# Altium PCB Eurocircuits4L.PcbDoc
Units mm, origin at the board's own origin, x right, y up, seen from the top; angles counter-clockwise.
Board outline 136.5 x 63.5 mm, 4 copper layers (Top Layer, Internal Plane 1, Internal Plane 2, Bottom Layer), stack 1.57 mm thick; 59 components, 57 nets, 305 pads, 5 vias.
Unrouted connection lines stored in the file: 149.
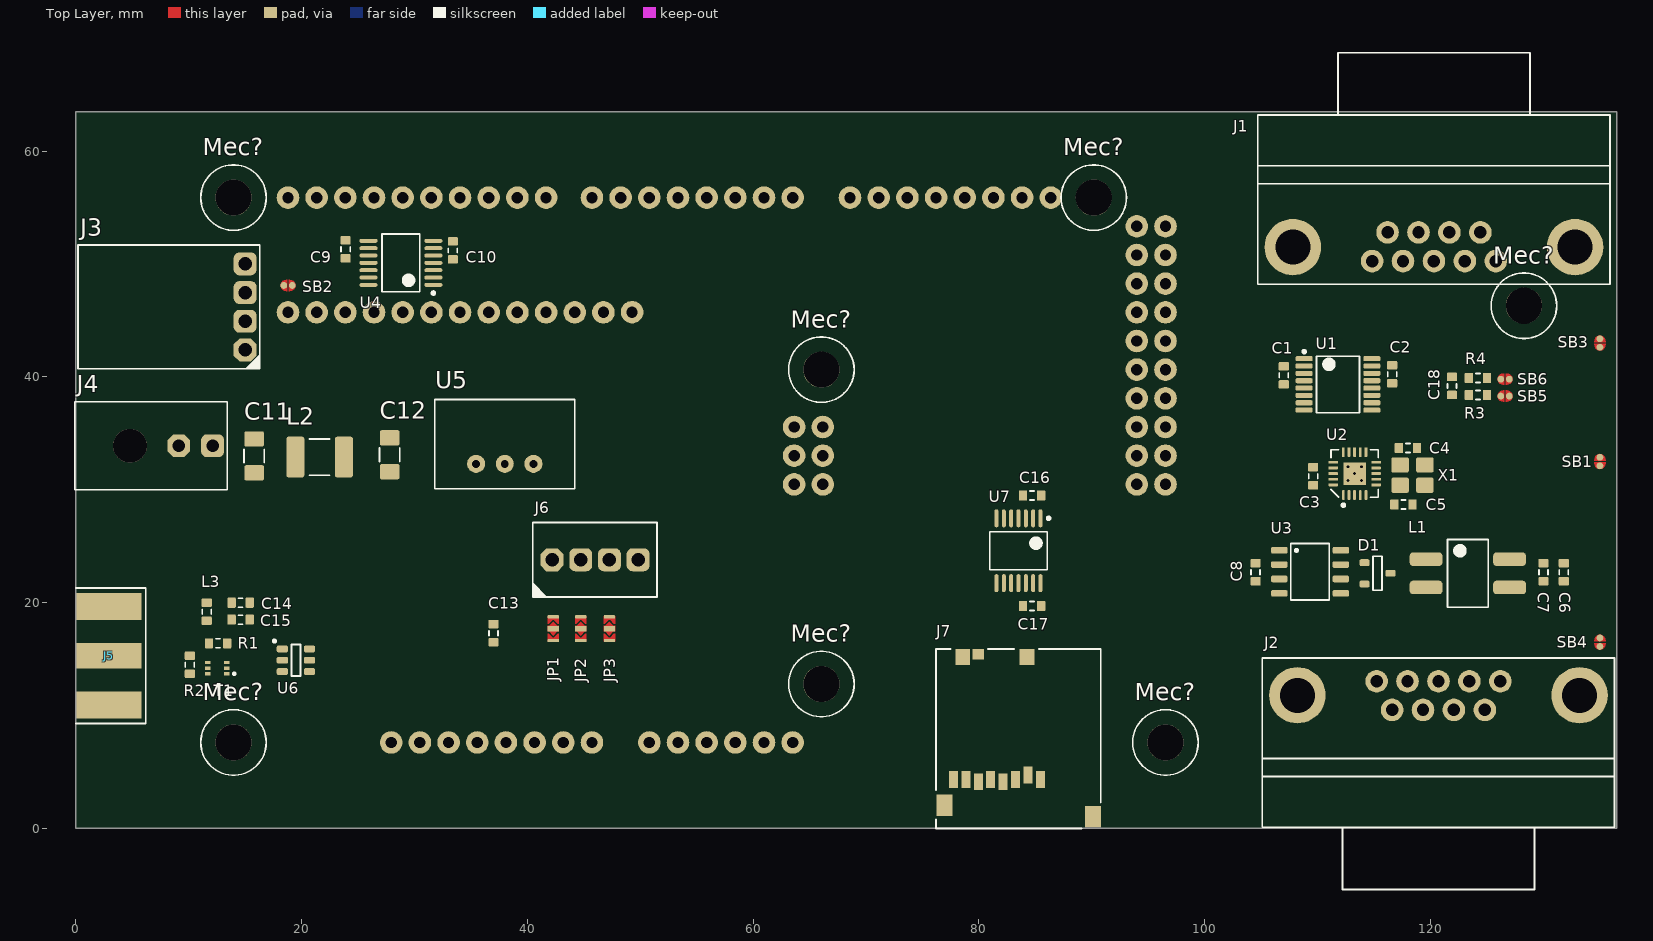
[diagram p0: Top Layer view]
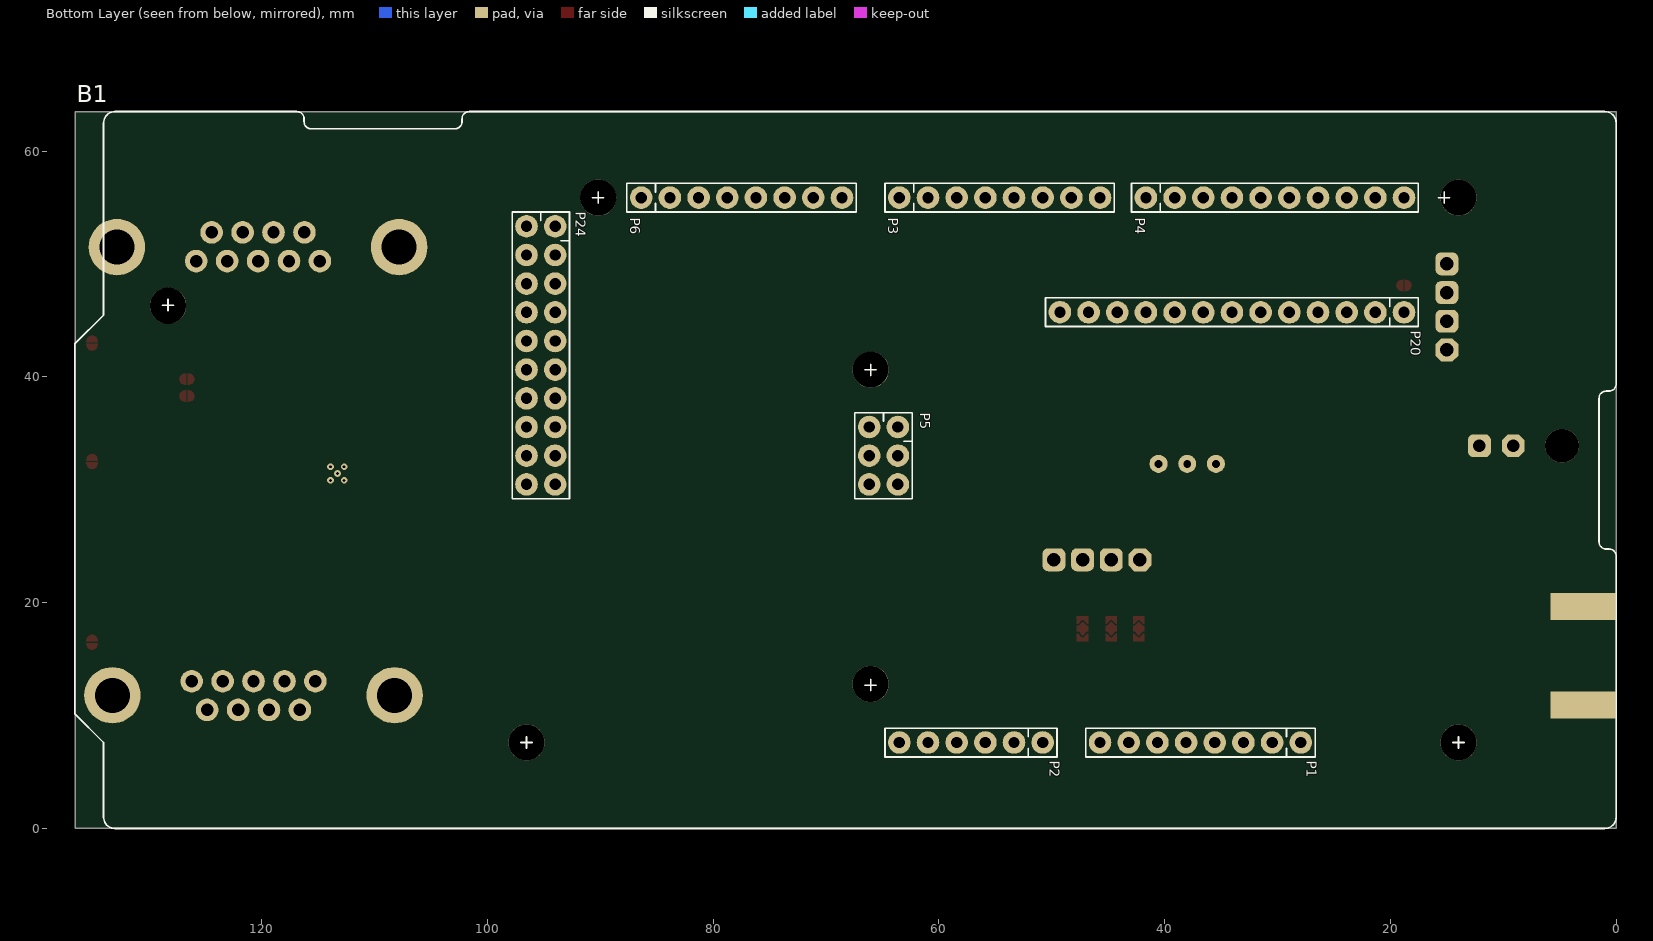
[diagram p1: Bottom Layer view, seen from below]
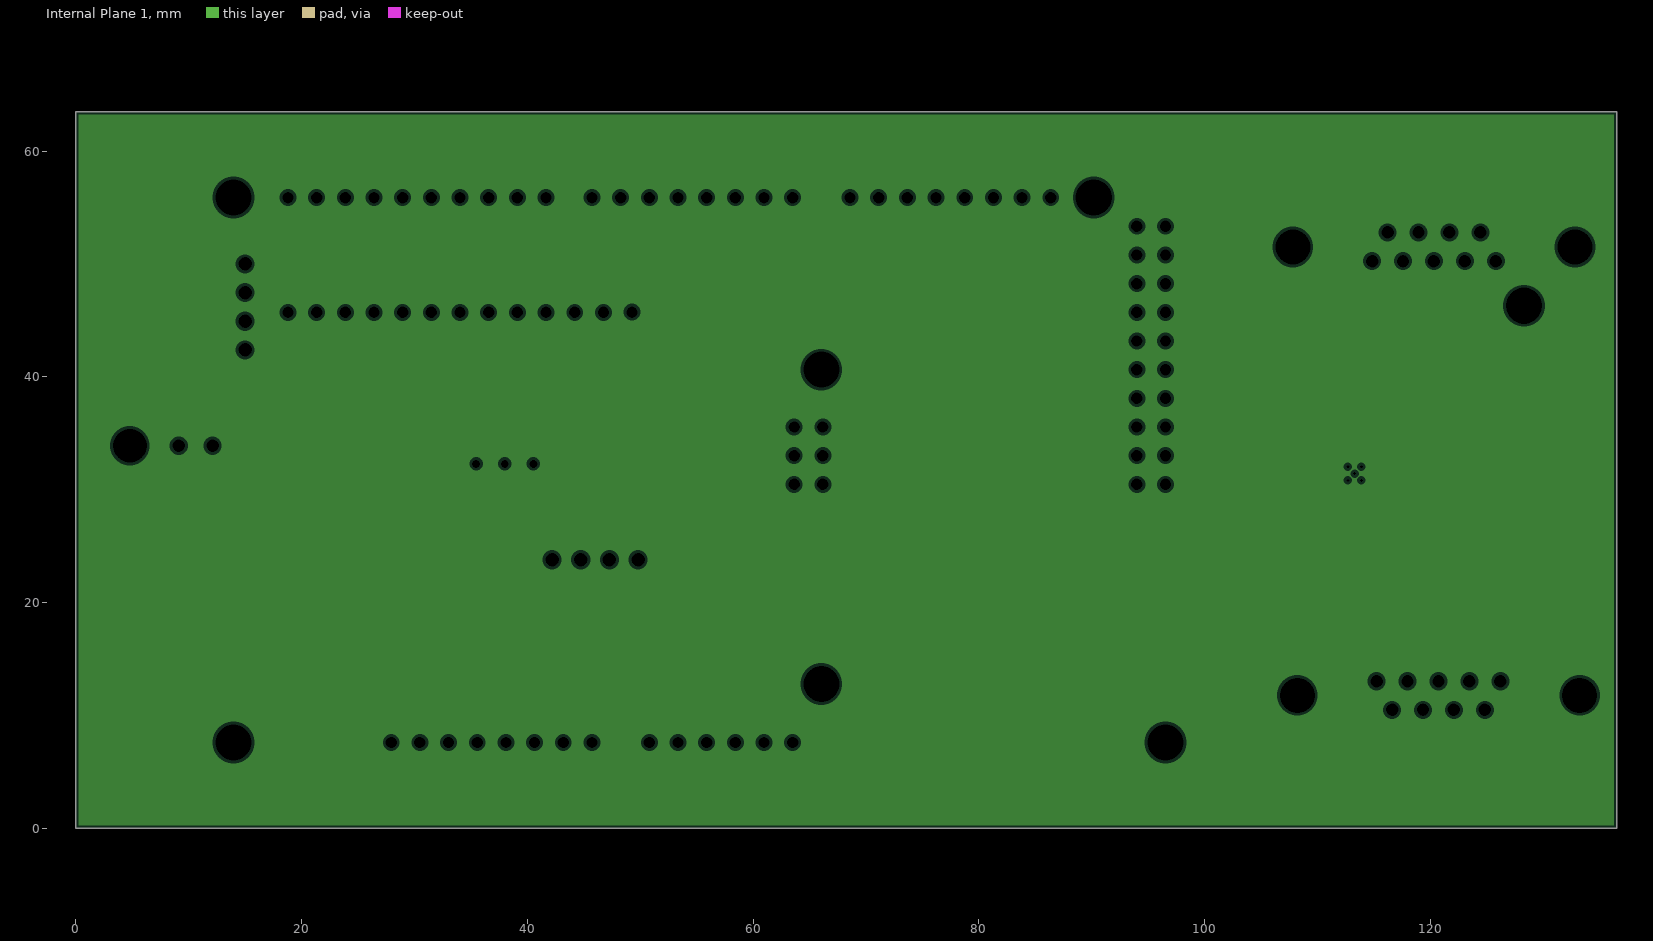
[diagram p2: Internal Plane 1, clearances drawn from the general rule]
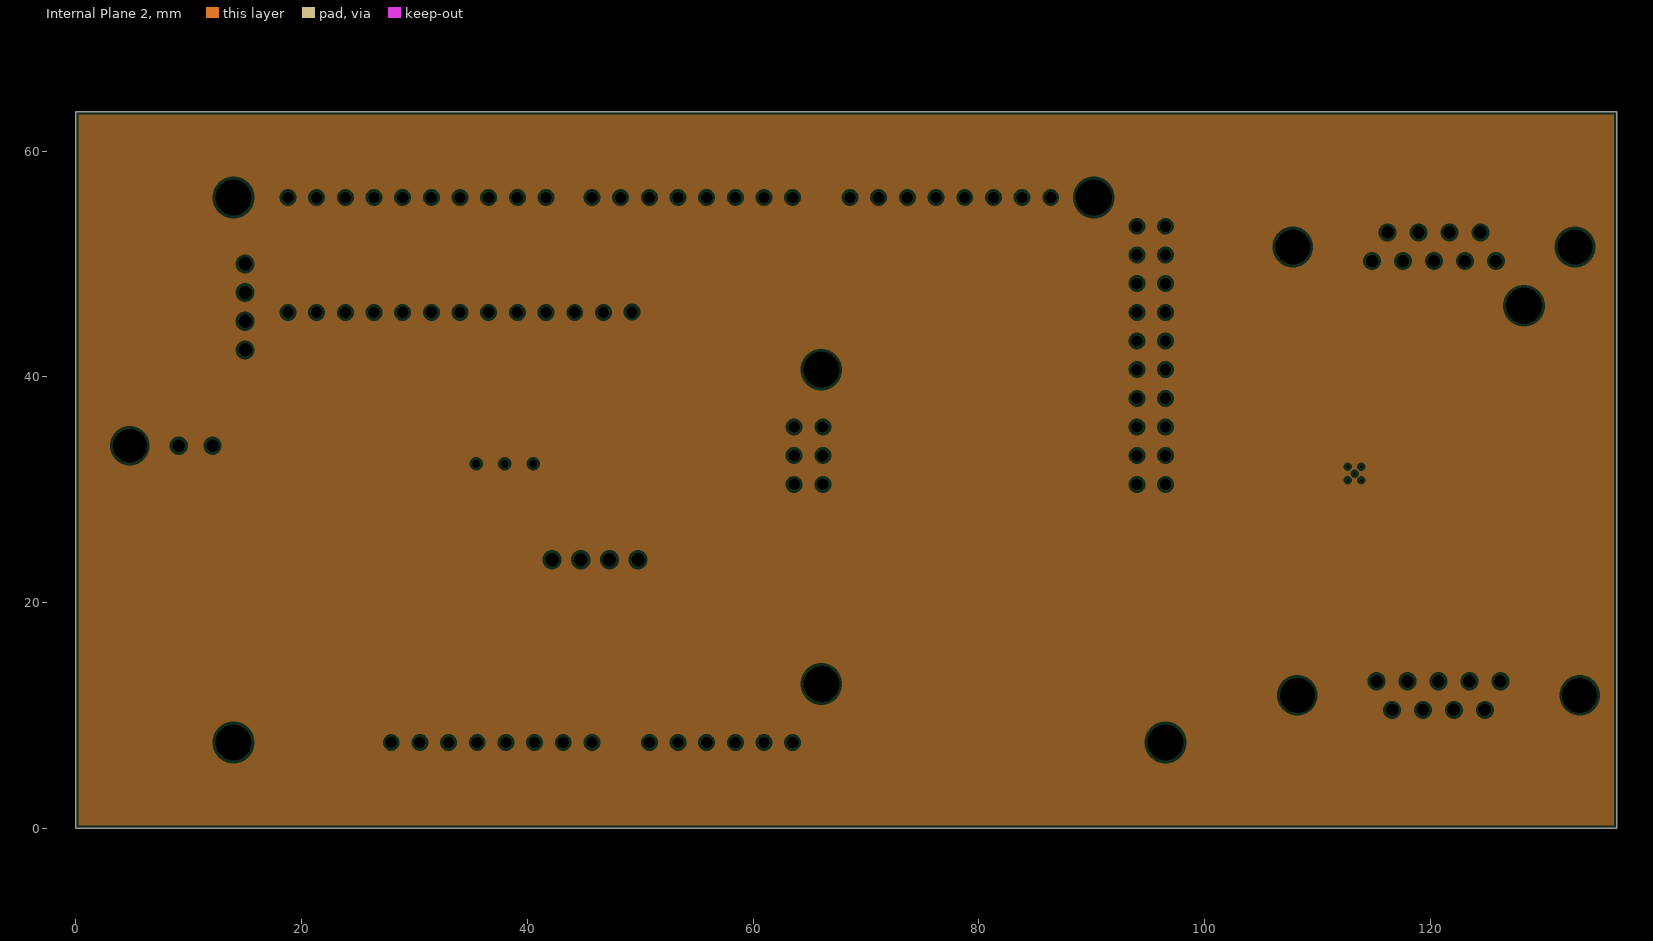
[diagram p3: Internal Plane 2, clearances drawn from the general rule]

## Layer stack, top to bottom
Top Solder: solder mask 0.01, Solder Resist, Dk 3.5
Top Layer: signal copper 0.035
Dielectric 1: prepreg 0.36, PR7826, Dk 4.32
Internal Plane 1: plane copper 0.035
Dielectric 3: core 0.71, FR-4, Dk 4.2
Internal Plane 2: plane copper 0.035
Dielectric 2: prepreg 0.36, PR7826, Dk 4.32
Bottom Layer: signal copper 0.035
Bottom Solder: solder mask 0.01, Solder Resist, Dk 3.5

## Board outline
0,0 90.709,0 136.5,0 136.5,63.5 0,63.5

## Design rules (kind name [scope] priority, off if disabled: settings)
AcuteAngle [All] p1 off: minimum=9.00000000000000E+0001 checktracksonly=TRUE
AssemblyTestPointUsage [All] p1 off:
AssemblyTestpoint [All] p1 off: testpointundercomponent=TRUE minsize=1.016 maxsize=2.54 preferedsize=1.524 minholesize=0 maxholesize=1.016 preferedholesize=0.813 testpointgrid=0.025 usegrid=TRUE gridtolerance=0 allowsidetop=TRUE allowsidebottom=TRUE
BoardOutlineClearance [All] p1 off: gap=0.25 ignorepadtopadclearanceinfootprint=FALSE
Clearance [All] p1: gap=0.15 ignorepadtopadclearanceinfootprint=FALSE except(0: Arc-Hole Track-Hole SMDPad-Hole THPad-Hole Via-Hole Fill-Hole Poly-Hole Region-Hole Text-Hole)
ComponentClearance [All] p1 off: gap=0.25 collisioncheckmode=3 verticalgap=0.25 showdistances=FALSE
DiffPairsRouting [All] p1 off: maxlimit=0.254 minlimit=0.254 mostfreqgap=0.254 toplayer_minwidth=0.381 toplayer_maxwidth=0.381 toplayer_prefwidth=0.381 bottomlayer_minwidth=0.381 bottomlayer_maxwidth=0.381 bottomlayer_prefwidth=0.381 maxuncoupledlength=12.7
FabricationTestPointUsage [All] p1 off: valid=0 allowmultiple=FALSE
FabricationTestpoint [All] p1 off: side=3 testpointundercomponent=TRUE minsize=1.016 maxsize=2.54 preferedsize=1.524 minholesize=0 maxholesize=1.016 preferedholesize=0.813 testpointgrid=0.025 allowsidetop=TRUE allowsidebottom=TRUE usegrid=TRUE gridtolerance=0
FanoutControl Fanout_BGA [IsBGA] p1 off: bgadir=Out bgaviamode=Centered fanoutstyle=Auto fanoutdirection=Alternating viagrid=0.025 // Fanout_BGA (Default Rule)
FanoutControl Fanout_LCC [IsLCC] p2 off: bgadir=Out bgaviamode=Centered fanoutstyle=Auto fanoutdirection=Alternating viagrid=0.025 // Fanout_LCC (Default Rule)
FanoutControl Fanout_SOIC [IsSOIC] p3 off: bgadir=Out bgaviamode=Centered fanoutstyle=Auto fanoutdirection=Alternating viagrid=0.025 // Fanout_SOIC (Default Rule)
FanoutControl Fanout_Small [(CompPinCount < 5)] p4 off: bgadir=Out bgaviamode=Centered fanoutstyle=Auto fanoutdirection=OutThenIn viagrid=0.025 // Fanout_Small (Default Rule)
FanoutControl Fanout_Default [All] p5 off: bgadir=Out bgaviamode=Centered fanoutstyle=Auto fanoutdirection=Alternating viagrid=0.025 // Fanout_Default (Default Rule)
Height [All] p1 off: minheight=0 maxheight=25.4 prefheight=12.7
HoleSize [All] p1: absolutevalues=TRUE maxlimit=3 minlimit=0.25 maxpercent=80.000 minpercent=20.000
HoleToHoleClearance [All] p1 off: gap=0.25 allowstackedmicrovias=TRUE
LayerPairs [All] p1 off: enforce=TRUE
MinimumAnnularRing [All] p1 off: minimumring=0.175
MinimumSolderMaskSliver [All] p1 off: minsoldermaskwidth=0
NetAntennae [All] p1 off: netantennaetolerance=0
PasteMaskExpansion [All] p1 off: expansion=0
PlaneClearance [All] p1: clearance=0.25
PlaneConnect [All] p1: planeconnectstyle=Direct reliefexpansion=0.5 reliefentries=4 reliefconductorwidth=0.25 reliefairgap=0.25
PolygonConnect [All] p1: connectstyle=Direct reliefconductorwidth=0.25 reliefentries=4 polygonreliefangle="90 Angle" airgapwidth=0.25
RoutingCorners [All] p1 off: cornerstyle=45-Degree minsetback=2.5 maxsetback=2.5
RoutingLayers [All] p1 off: top layer_v5=TRUE bottom layer_v5=TRUE
RoutingPriority [All] p1 off: routingpriority=0
RoutingTopology [All] p1 off: topology=Shortest
RoutingVias [All] p1: holewidth=0.25 width=0.6 viastyle="Through Hole" minholewidth=0.15 minwidth=0.5 maxholewidth=0.9 maxwidth=1.5 useviatemplates=TRUE viatemplateguid#1={857F750E-5D3C-416E-893E-D7E0D3E4223C} viatemplatename#1=v60h25m0mx0
SilkToBoardRegionClearance [All] p1 off:
SilkToSilkClearance [All] p1 off: silktosilkclearance=0
SilkToSolderMaskClearance [IsPad] p1 off: minsilkscreentomaskgap=0 clearancetoexposedcopper=TRUE
SolderMaskExpansion [All] p1: expansion=0 istentingtop=FALSE
Width [All] p1: maxlimit=4 minlimit=0.15 preferedwidth=0.25
3 further rules are at their usual default settings.

## Classes and differential pairs
component class nRF7002-DK: B1 C9 C10 C11 C12 J3 J4 L2 Mec? SB2 U4 U5
component class GPS-SD: C13 C14 C15 C16 C17 J5 J6 J7 JP1 JP2 JP3 L3 R1 R2 T1 U6 U7
component class CanController: C1 C2 C3 C4 C5 C6 C7 C8 C18 D1 J1 J2 L1 R3 R4 SB1 SB3 SB4 SB5 SB6 U1 U2 U3 X1

## Components (designator, comment, footprint, x,y, rotation, side; value= is the part's Value field where it differs from the comment)
B1 "NRF52DK socket" "nRF5340DK SOCKET" 0,63.5 r0 bottom locked
C1 "100n" "CAPACITOR 1608 REFLOW" 107,40.136 r90 top
C2 "100n" "CAPACITOR 1608 REFLOW" 116.6,40.236 r90 top
C3 "100n" "CAPACITOR 1608 REFLOW" 109.6,31.2 r90 top
C4 "22pF" "CAPACITOR 1608 REFLOW" 118,33.7 r0 top
C5 "22pF" "CAPACITOR 1608 REFLOW" 117.6,28.7 r180 top
C6 "100pF" "CAPACITOR 1608 REFLOW" 131.8,22.7 r270 top
C7 "100pF" "CAPACITOR 1608 REFLOW" 130,22.7 r90 top
C8 "100n" "CAPACITOR 1608 REFLOW" 104.5,22.7 r270 top
C9 "100n" "CAPACITOR 1608 REFLOW" 23.9,51.3 r270 top
C10 "100n" "CAPACITOR 1608 REFLOW" 33.4,51.2 r270 top
C11 "10uF" "CAPACITOR 3216 REFLOW" 15.8,33 r270 top
C12 "10uF" "CAPACITOR 3216 REFLOW" 27.8,33.1 r270 top
C13 "100n" "CAPACITOR 1608 REFLOW" 37,17.3 r270 top
C14 "47pF" "CAPACITOR 1608 REFLOW" 14.6,20 r0 top
C15 "10nF" "CAPACITOR 1608 REFLOW" 14.6,18.5 r180 top
C16 "100n" "CAPACITOR 1608 REFLOW" 84.7,29.5 r0 top
C17 "100n" "CAPACITOR 1608 REFLOW" 84.7,19.7 r0 top
C18 "4.7nF" "CAPACITOR 1608 REFLOW" 121.9,39.2 r270 top
D1 "ESDCAN__-2BLY" "SOT23 P0.95 C1.6x3.0 H1.3" 115.3,22.6 r0 top
J1 "D-SUB 9 MALE GROUNDED" "D-SUB 9 MALE ANGLE" 120.3,55.7 r90 top
J2 "D-SUB 9 MALE GROUNDED" "D-SUB 9 MALE ANGLE" 120.7,7.6 r270 top
J3 "MOLEX 22057048" "MOLEX 22057048" 15,46.2 r270 top
J4 "MOLEX 43045-0200" "MOLEX 43045-0200" 10.62,33.9 r270 top
J5 "732511150" "SMA EDGE Molex 732511150" 0,15.3 r0 top
J6 "MOLEX 22272041" "MOLEX 22272041" 46,23.8 r180 top
J7 "GTC MEM20_1-00-195-00-A" "SD MICRO GCT MEM2051-00-195-00-A" 83.5,8 r0 top
JP1 "{Value}" "JUMPER3 SMD 1608" 42.3,17.7 r90 top
JP2 "{Value}" "JUMPER3 SMD 1608" 44.73,17.7 r90 top
JP3 "{Value}" "JUMPER3 SMD 1608" 47.27,17.7 r90 top
L1 "*" "L CM 2X B82793C EPCOS" 123.3,22.6 r0 top
L2 "*" "INDUCTOR 4532 REFLOW" 21.6,32.9 r0 top
L3 "27nH" "INDUCTOR 1608 REFLOW" 11.6,19.2 r90 top
Mec? "" "Screw Hex Socket M3X5 Unconnected" 90.17,55.88 r0 top locked
Mec? "" "Screw Hex Socket M3X5 Unconnected" 128.27,46.3 r0 top locked
Mec? "" "Screw Hex Socket M3X5 Unconnected" 13.97,7.62 r0 top locked
Mec? "" "Screw Hex Socket M3X5 Unconnected" 66.04,40.64 r0 top locked
Mec? "" "Screw Hex Socket M3X5 Unconnected" 13.97,55.88 r0 top locked
Mec? "" "Screw Hex Socket M3X5 Unconnected" 66.04,12.8 r0 top locked
Mec? "" "Screw Hex Socket M3X5 Unconnected" 96.52,7.62 r0 top locked
R1 "10" "RESISTOR 1608 REFLOW" 12.6,16.4 r180 top
R2 "100k" "RESISTOR 1608 REFLOW" 10.1,14.5 r270 top
R3 "60" "RESISTOR 1608 REFLOW" 124.2,38.4 r0 top
R4 "60" "RESISTOR 1608 REFLOW" 124.2,39.9 r0 top
SB1 "*" "Solder Bridge 1mm Unconnected" 135,32.5 r90 top net-tie
SB2 "*" "Solder Bridge 1mm Unconnected" 18.8,48.1 r0 top net-tie
SB3 "*" "Solder Bridge 1mm Unconnected" 135,43 r90 top net-tie
SB4 "*" "Solder Bridge 1mm Unconnected" 135,16.5 r270 top net-tie
SB5 "*" "Solder Bridge 1mm Unconnected" 126.6,38.3 r0 top net-tie
SB6 "*" "Solder Bridge 1mm Unconnected" 126.6,39.8 r0 top net-tie
T1 "Si1016X" "SOT563F P0.5 C1.6x1.2 H0.6" 12.534,14.2 r180 top
U1 "TXB0106PWR" "TSSOP16 P0.65 C5.0x4.5 H1.1" 111.8,39.336 r0 top
U2 "MCP2515I/ML" "QFN20 P0.5 T2.05x2.05 C4.0x4.0 H0.85" 113.273,31.436 r90 top
U3 "SN65HVD232D" "SO8 P1.27 C4.0X5.0 H1.75" 109.325,22.735 r0 top
U4 "TXB0104PWR" "TSSOP14 P0.65 C4.4x5.0 H1.1" 28.8,50.1 r180 top
U5 "*" "TRACO TSR 1" 38,32.3 r0 top
U6 "SN74LVC2G17" "SOT23-6 P0.95 C1.5x3.0 H1.3" 19.5,14.9 r0 top
U7 "TXB0104PWR" "TSSOP14 P0.65 C4.4x5.0 H1.1" 83.5,24.6 r270 top
X1 "*" "CRYSTAL C3.2x2.5 Kyocera CX3225SB" 118.4,31.3 r0 top

## Footprints (in the part's own frame and the unit in brackets; to place one, negate y for a bottom-side part, rotate by r counter-clockwise, add the part's x,y. Pads: shape width x height; smd on the part's side, far side on the other; paste and mask are expansions set on the pad)
"CAPACITOR 1608 REFLOW" [mm] "Capacitor SMD 1.6x0.8mm (0603-imperial)"
  rrect25% 0.75x0.9 smd: 1(-0.8,0) 2(0.8,0)
  silkscreen extent -0.2,-0.4 0.2,0.4, body extent -0.8,-0.4 0.8,0.4, height 0.8
"CAPACITOR 3216 REFLOW" [mm] "Capacitor SMD 3.2x1.6mm (1206-imperial)"
  rrect25% 1.35x1.75 smd: 1(-1.5,0) 2(1.5,0)
  silkscreen extent -0.6,-0.9 0.6,0.9, body extent -1.7,-0.9 1.7,0.9, height 1.6
"CRYSTAL C3.2x2.5 Kyocera CX3225SB" [mm] "CRYSTAL C3.2x2.5 Kyocera CX3225SB"
  rrect25% 1.55x1.35 smd: 1(-1.1,-0.9) 2(1.1,-0.9) 3(1.1,0.9) 4(-1.1,0.9)
  body extent -1.6,-1.3 1.6,1.3, height 0.6
"D-SUB 9 MALE ANGLE" [mm] "D-SUB9M HARTING"
  round 2 hole 1.1: 1(-5.44,-5.48) 2(-5.44,-2.74) 3(-5.44,0) 4(-5.44,2.74) 5(-5.44,5.48) 6(-2.9,-4.11) 7(-2.9,-1.37) 8(-2.9,1.37) 9(-2.9,4.11)
  round 5 hole 3.1: 10(-4.2,12.5) 11(-4.2,-12.5)
  silkscreen extent -7.5,-15.6 13,15.6, body extent -7.4,-15.6 13.8,15.6, height 13.65
"INDUCTOR 1608 REFLOW" [mm] "Inductor SMD 1.6x0.8mm (0603-imperial)"
  rrect25% 0.75x0.9 smd: 1(-0.8,0) 2(0.8,0)
  silkscreen extent -0.2,-0.4 0.2,0.4, body extent -0.8,-0.4 0.8,0.4, height 0.45
"INDUCTOR 4532 REFLOW" [mm] "Inductor SMD 4.5x3.2mm (1812-imperial)"
  rrect25% 1.6x3.6 smd: 1(-2.15,0) 2(2.15,0)
  silkscreen extent -0.9,-1.6 0.9,1.6, body extent -2.3,-1.6 2.3,1.6, height 1.2
"JUMPER3 SMD 1608" [mm] "JUMPER SMD 3LEADS 1608 (0603-Imperial)"
  rrect50% 0.3x1 smd paste-0.8 mask-0.5: 1(-1.05,0) 3(1.05,0)
  rect 0.5x1 smd paste-0.8 mask-0.5: 2(0,0)
  Top Layer region: -1.1,0.5 -1.1,-0.5 -0.45,-0.5 -0.45,-0.4 -0.8,-0.05 -0.8,0.05 -0.45,0.4 -0.45,0.5
  Top Layer region: -0.25,0.35 -0.625,0 -0.25,-0.35 -0.25,-0.5 0.25,-0.5 0.25,-0.35 0.6,0 0.25,0.35 0.25,0.5 0.1,0.5 -0.25,0.5
  Top Layer region: 1.1,-0.5 1.1,0.5 0.45,0.5 0.45,0.4 0.8,0.05 0.8,-0.05 0.45,-0.4 0.45,-0.5
"L CM 2X B82793C EPCOS" [mm]
  rrect50% 2.9x1.2 smd: 1(-3.7,1.25) 2(-3.7,-1.25) 3(3.7,-1.25) 4(3.7,1.25)
  silkscreen extent -1.8,-3 1.8,3, body extent -3.55,-3 3.55,3, height 4.9
"MOLEX 43045-0200" [mm] "Micro-Fit 3.0 Right Angle Header, 3.00mm Pitch, Dual Row, 2 Circuits"
  round 3 hole 3 unplated paste-25.4 mask-25.4: 0(0,-5.82)
  oct 2.032x2.032 hole 1.1: 1(0,-1.5)
  rrect50% 2.032x2.032 hole 1.1: 2(0,1.5)
  silkscreen extent -3.9,-10.7 3.9,2.8, body extent -3.57,-10.45 3.58,1.79, height 8.78
"MOLEX 22057048" [mil] "KK 254 Wire-to-Board Header, Right-Angle, 4 Circuits"
  oct 80x80 hole 47.24: 1(150,0)
  rrect50% 80x80 hole 47.24: 2(50,0) 3(-50,0) 4(-150,0)
  silkscreen extent -216,-583 216,51, body extent -200,-567 200,13, height 231
"MOLEX 22272041" [mil] "KK 254 Wire-to-Board Header, Vertical, 4 Circuits"
  oct 80x80 hole 47.24: 1(150,0)
  rrect50% 80x80 hole 47.24: 2(50,0) 3(-50,0) 4(-150,0)
  silkscreen extent -216,-130 218,130, body extent -200,-114 200,114, height 461
"nRF5340DK SOCKET" [mm] "nRF5340DK Dongle socket"
  round 2 hole 1: P1.1(27.941,55.88) P1.2(30.48,55.88) P1.3(33.021,55.88) P1.4(35.56,55.88) P1.5(38.101,55.88) P1.6(40.641,55.88) P1.7(43.181,55.88) P1.8(45.721,55.88) P2.1(50.801,55.88) P2.2(53.34,55.88) P2.3(55.881,55.88) P2.4(58.42,55.88) P2.5(60.961,55.88) P2.6(63.501,55.88) P3.1(63.501,7.62) P3.2(60.961,7.62) P3.3(58.421,7.62) P3.4(55.881,7.62) P3.5(53.341,7.62) P3.6(50.8,7.62) P3.7(48.26,7.62) P3.8(45.72,7.62) P4.1(41.657,7.62) P4.2(39.117,7.62) P4.3(36.577,7.62) P4.4(34.037,7.62) P4.5(31.497,7.62) P4.6(28.957,7.62) P4.7(26.417,7.62) P4.8(23.877,7.62) P4.9(21.336,7.62) P4.10(18.796,7.62) P5.1(63.627,27.94) P5.2(66.167,27.94) P5.3(63.627,30.48) P5.4(66.167,30.48) P5.5(63.627,33.02) P5.6(66.167,33.02) P6.1(86.361,7.62) P6.2(83.821,7.62) P6.3(81.281,7.62) P6.4(78.741,7.62) P6.5(76.201,7.62) P6.6(73.661,7.62) P6.7(71.121,7.62) P6.8(68.581,7.62) P20.1(18.797,17.78) P20.2(21.337,17.78) P20.3(23.877,17.78) P20.4(26.417,17.78) P20.5(28.957,17.78) P20.6(31.497,17.78) P20.7(34.037,17.78) P20.8(36.577,17.78) P20.9(39.117,17.78) P20.10(41.657,17.78) P20.11(44.197,17.78) P20.12(46.737,17.78) P20.13(49.277,17.768) P24.1(93.98,10.16) P24.2(96.52,10.16) P24.3(93.98,12.7) P24.4(96.52,12.7) P24.5(93.98,15.24) P24.6(96.52,15.24) P24.7(93.98,17.78) P24.8(96.52,17.78) P24.9(93.98,20.32) P24.10(96.52,20.32) P24.11(93.98,22.86) P24.12(96.52,22.86) P24.13(93.98,25.4) P24.14(96.52,25.4) P24.15(93.98,27.94) P24.16(96.52,27.94) P24.17(93.98,30.48) P24.18(96.52,30.48) P24.19(93.98,33.02) P24.20(96.52,33.02)
  silkscreen extent 0,0 136.53,63.5, body extent 17.53,6.35 97.79,57.15, height 8.5
"QFN20 P0.5 T2.05x2.05 C4.0x4.0 H0.85" [mm] "QFN20 P0.5 T2.05x2.0 C4.0x4.0 H0.85"
  rrect50% 0.85x0.25 smd: 1(-1.9,1) 2(-1.9,0.5) 3(-1.9,0) 4(-1.9,-0.5) 5(-1.9,-1) 11(1.9,-1) 12(1.9,-0.5) 13(1.9,0) 14(1.9,0.5) 15(1.9,1)
  rrect50% 0.25x0.85 smd: 6(-1,-1.9) 7(-0.5,-1.9) 8(0,-1.9) 9(0.5,-1.9) 10(1,-1.9) 16(1,1.9) 17(0.5,1.9) 18(0,1.9) 19(-0.5,1.9) 20(-1,1.9)
  rect 2x2 smd: 21(0,0)
  silkscreen extent -2.92,-2.1 2.1,2.1, body extent -2,-2 2,2, height 0.86
"RESISTOR 1608 REFLOW" [mm] "Resistor SMD 1.6x0.8mm (0603-imperial)"
  rrect25% 0.75x0.9 smd: 1(-0.8,0) 2(0.8,0)
  silkscreen extent -0.2,-0.4 0.2,0.4, body extent -0.77,-0.42 0.78,0.43, height 0.45
"Screw Hex Socket M3X5 Unconnected" [mm] "Screw Hex Socket M3X5 Unconnected BN610"
  round 3.2 hole 3.2 unplated paste+0 mask+0: 0(0,0)
  silkscreen extent -2.9,-2.9 2.9,2.9, body extent -2.75,-2.75 2.75,2.75, height 3.01
"SD MICRO GCT MEM2051-00-195-00-A" [mm] "SD MICRO GCT MEM2051-00-195-00-A"
  rect 1.4x1.9 smd: 0(-6.55,-5.95) 0(6.6,-6.95)
  rect 1.3x1.4 smd: 0(-4.95,7.2) 0(0.75,7.2)
  rect 0.8x1.5 smd: 1(1.94,-3.66) 2(0.84,-3.26) 3(-0.26,-3.66) 4(-1.36,-3.86) 5(-2.46,-3.66) 6(-3.56,-3.86) 7(-4.66,-3.66) 8(-5.76,-3.66)
  rect 1x0.95 smd: 9(-3.56,7.425)
  silkscreen extent -7.3,-8 7.3,7.9, body extent -7.05,-11.27 7.05,7.57, height 2
"SMA EDGE Molex 732511150" [mm] "Connector SMA, Board edge mount, SMA EDGE Molex 732511150"
  rect 5.8x2.3 smd: 1(2.9,0)
  rect 5.8x2.4 smd: 2(2.9,-4.35) 2(2.9,4.38)
  rect 5.8x2.4 smd far side: 2(2.9,-4.35) 2(2.9,4.38)
  silkscreen extent 0,-6 6.2,6, body extent -9.6,-4.76 4.67,4.76, height 4.36
"SO8 P1.27 C4.0X5.0 H1.75" [mm] "8-Pin Small Outline Integrated Circuit 1.27 mm Pitch, IPC Medium Density"
  rrect50% 1.45x0.6 smd: 1(-2.725,1.905) 2(-2.725,0.635) 3(-2.725,-0.635) 4(-2.725,-1.905) 5(2.725,-1.905) 6(2.725,-0.635) 7(2.725,0.635) 8(2.725,1.905)
  silkscreen extent -1.7,-2.5 1.7,2.5, body extent -3,-2.45 3,2.45, height 1.75
"Solder Bridge 1mm Unconnected" [mm] "Solder Bridge Unconnected by default, Solderable"
  round 0.6 smd paste-0.8 mask+0: 1(-0.375,0) 2(0.375,0)
  Top Layer region: 0.075,-0.5 0.175,-0.5 0.675,0 0.175,0.5 0.075,0.5
  Top Layer region: -0.075,0.5 -0.175,0.5 -0.675,0 -0.175,-0.5 -0.075,-0.5
  Top Layer lines w0.2: -0.175,0.4 ccw(c-0.175,0) -0.175,-0.4 ; 0.175,0.4 cw(c0.175,0) 0.175,-0.4
"SOT23 P0.95 C1.6x3.0 H1.3" [mm] "SOT23, 3-Leads, Body 1.6x3.0mm, Pitch 0.95mm, IPC Medium Density"
  rrect50% 0.9x0.6 smd: 1(-1.15,0.95) 2(-1.15,-0.95) 3(1.15,0)
  silkscreen extent -0.4,-1.5 0.4,1.5, body extent -1.4,-1.45 1.4,1.45, height 1.3
"SOT23-6 P0.95 C1.5x3.0 H1.3" [mm] "SOT23, 6-Leads, Body 1.6x3.0mm, Pitch 0.95mm, IPC Medium Density"
  rrect50% 1x0.6 smd: 1(-1.2,1) 2(-1.2,0) 3(-1.2,-1) 4(1.2,-1) 5(1.2,0) 6(1.2,1)
  silkscreen extent -2,-1.4 0.4,1.8, body extent -1.4,-1.45 1.4,1.45, height 1.45
"SOT563F P0.5 C1.6x1.2 H0.6" [mm] "SOT563, 6-Leads, Body 1.6x1.2mm, Pitch 0.5mm, Height 0.60mm"
  rect 0.492x0.3 smd: 1(-0.834,0.5) 2(-0.834,0) 3(-0.834,-0.5) 4(0.834,-0.5) 5(0.834,0) 6(0.834,0.5)
  silkscreen extent -1.6,0.39 -1.4,0.59, body extent -0.81,-0.8 0.81,0.8, height 0.6
"TRACO TSR 1" [mm] "DC/DC Converter"
  round 1.6 hole 0.7: 1(-2.54,0) 2(0,0) 3(2.54,0)
  silkscreen extent -6.2,-2.2 6.2,5.7, body extent -6,-2 6,5.5, height 10.5
"TSSOP14 P0.65 C4.4x5.0 H1.1" [mm] "TSSOP, 14-Leads, Body 5x4.4mm, Pitch 0.65mm, IPC Medium Density"
  oval 1.6x0.35 smd: 1(-2.875,1.95) 2(-2.875,1.3) 3(-2.875,0.65) 4(-2.875,0) 5(-2.875,-0.65) 6(-2.875,-1.3) 7(-2.875,-1.95) 8(2.875,-1.95) 9(2.875,-1.3) 10(2.875,-0.65) 11(2.875,0) 12(2.875,0.65) 13(2.875,1.3) 14(2.875,1.95)
  silkscreen extent -3,-2.55 1.68,2.8, body extent -2.25,-2.55 2.25,2.55, height 1.11
"TSSOP16 P0.65 C5.0x4.5 H1.1" [mm] "TSSOP-16 NXP"
  rrect50% 1.5x0.45 smd: 1(-3,2.275) 2(-3,1.625) 3(-3,0.975) 4(-3,0.325) 5(-3,-0.325) 6(-3,-0.975) 7(-3,-1.625) 8(-3,-2.275) 9(3,-2.275) 10(3,-1.625) 11(3,-0.975) 12(3,-0.325) 13(3,0.325) 14(3,0.975) 15(3,1.625) 16(3,2.275)
  silkscreen extent -3.12,-2.5 1.9,3.02, body extent -2.25,-2.5 2.25,2.5, height 1.1

## Part data
B1: library part "nRF5340DK Socket", "nRF53 development kit"
C1 C2 C3 C4 C5 C6 C7 C8 C9 C10 C11 C12 C13 C14 C15 C16 C17 C18: library part Capacitor, "Capacitor"
D1: library part "Diode ESDCAN__-2BLY", "Automotive dual-line TVS diode"
J1 J2: "D-Subminiature 9 way Plug Right Angle"
J3: "KK 254 Wire-to-Board Header, Right-Angle, 4 Circuits"
J4: "Micro-Fit 3.0 Right-Angle Header, 3.00mm, Dual Row, 2 Circuits"
J5: library part "SMA EDGE Molex 732511150", "SMA EDGE Molex 732511150"
J6: "KK 254 Wire-to-Board Header, Vertical, 4 Circuits"
J7: library part "SD-MICRO GTC MEM20_1-00-195-00-A", "SD Card Micro", Package=None, Availability=Warning, Check_prices=https://www.snapeda.com/parts/MEM2051-00-195-00-A/Global%20Connector%20Technology/view-part/779220/?ref=eda, MF="Global Connector Technology", MP=MEM2051-00-195-00-A, Price=None, Purchase-URL=https://pricing.snapeda.com/search/part/MEM2051-00-195-00-A/?ref=eda, SnapEDA_Link=https://www.snapeda.com/parts/MEM2051-00-195-00-A/Global%20Connector%20Technology/view-part/779220/?ref=snap
JP1 JP2 JP3: library part "JUMPER 3 POS", "JUMPER 3 POS"
L1: library part "L CM 2X B82793C0 EPCOS", "Inductor Common Mode Filter"
L2 L3: library part Inductor, "Inductor"
Mec? Mec? Mec? Mec? Mec? Mec? Mec?: library part "Screw Hex Socket Unconnected", "Screw Hex Socket Unconnected BN610"
R1 R2 R3 R4: library part Resistor, "Resistor"
SB1 SB2 SB3 SB4 SB5 SB6: library part "Solderbridge Unconnected", "Solderbridge Unconnected"
T1: "Complementary N- and P-Channel 20 V (D-S) MOSFET"
U1: "6-Bit Bidirectional Level-Shifting and Voltage Translator / With Auto-Direction Sensing and ±15-kV ESD Protection"
U2: "Stand-Alone CAN Controller with SPI Interface"
U3: "CAN Bus Transceiver 3V3"
U4 U7: "4-Bit Bidirectional Voltage-Level Translator With utomatic Direction Sensing and ±15-kV ESD Protection"
U5: library part "TRACO TSR 1", "DC/DC Converter"
U6: "Dual Schmitt-Trigger Buffer"
X1: library part "Crystal C3.2x2.5 Kyocera CX3225SB", "Crystal C3.2x2.5 Kyocera CX3225SB"

## Via types
v1: diameter 0.6, hole 0.25, Top Layer to Bottom Layer, 5 vias

## Nets (pads, with @x,y where several pads share a name; then routed paths per layer and width w, separated by ;. In a path a pad name is that pad's centre, name@x,y a point inside that pad or via, vN(x,y) a via of type N, cw(c..) or ccw(c..) an arc to the next point about the centre after c; other vN are vias at no path point)
+1.8: B1.P1.1 B1.P1.2 B1.P1.4 C1.2 C9.1 C16.2 U1.2 U1.8 U4.1 U4.8 U7.1 U7.8
+3.3: B1.P20.9 C2.2 C3.2 C8.2 C10.2 C17.2 J7.4 JP1.1 SB2.2 U1.15 U2.17 U2.18 U3.3 U4.14 U5.3 U7.14
+3.3-GPS: C13.2 JP1.2
+5: B1.P1.5
GND: B1.P1.6 B1.P1.7 B1.P4.7 B1.P24.19 B1.P24.20 C1.1 C2.1 C3.1 C4.1 C5.1 C6.1 C7.1 C8.1 C9.2 C10.1 C11.2 C12.2 C13.1 C15.1 C16.1 C17.1 C18.1 D1.3 J1.3 J1.9 J2.3 J2.9 J3.4 J4.1 J5.2 J6.4 J7.6 SB3.1 SB4.1 T1.1 U1.9 U2.8 U2.21 U3.2 U4.7 U5.2 U6.2 U6.3 U7.7 X1.2 X1.4
  other v1: 112.673,30.836 113.873,30.836 113.273,31.436 112.673,32.036 113.873,32.036
NetB1_P2.2: B1.P2.2 U7.5
NetB1_P2.3: B1.P2.3 U7.4
NetB1_P2.4: B1.P2.4 U7.3
NetB1_P2.5: B1.P2.5 U7.2
NetB1_P2.6: B1.P2.6 J7.9
NetB1_P4.1: B1.P4.1 U1.7
NetB1_P4.2: B1.P4.2 U1.5
NetB1_P4.3: B1.P4.3 U1.4
NetB1_P4.4: B1.P4.4 U1.3
NetB1_P4.5: B1.P4.5 U1.1
NetB1_P4.6: B1.P4.6 U4.5
NetB1_P4.8: B1.P4.8 U4.4
NetB1_P4.9: B1.P4.9 U4.3
NetB1_P4.10: B1.P4.10 U4.2
NetC4_2: C4.2 U2.7 X1.3
NetC5_2: C5.2 U2.6 X1.1
NetC6_2: C6.2 J1.8 J2.8 L1.3 SB5.2
NetC7_2: C7.2 J1.4 J2.4 L1.4 SB6.2
NetC12_1: C12.1 L2.2 U5.1
NetC14_1: C14.1 J5.1 L3.2
NetC15_2: C15.2 L3.1 R1.2 U6.1
NetC18_2: C18.2 R3.1 R4.1
NetD1_1: D1.1 L1.1 U3.7
NetD1_2: D1.2 L1.2 U3.6
NetJ1_6: J1.6 J2.6 SB1.2
NetJ1_10: J1.10 J1.11 SB3.2
NetJ2_10: J2.10 J2.11 SB4.2
NetJ3_1: J3.1 SB2.1
NetJ3_2: J3.2 U4.11
NetJ3_3: J3.3 U4.10
NetJ6_1: J6.1 JP1.3
NetJ6_2: J6.2 JP2.3
NetJ6_3: J6.3 JP3.3
NetJ7_2: J7.2 U7.10
NetJ7_3: J7.3 U7.12
NetJ7_5: J7.5 U7.13
NetJ7_7: J7.7 U7.11
NetJP2_1: JP2.1 U4.12
NetJP3_1: JP3.1 U4.13
NetR1_1: R1.1 T1.3
NetR2_1: R2.1 T1.4 U6.5
NetR2_2: R2.2 T1.5 T1.6
NetR3_2: R3.2 SB5.1
NetR4_2: R4.2 SB6.1
NetU1_10: U1.10 U2.11
NetU1_12: U1.12 U2.15
NetU1_13: U1.13 U2.14
NetU1_14: U1.14 U2.12
NetU1_16: U1.16 U2.16
NetU2_19: U2.19 U3.1
NetU2_20: U2.20 U3.4
Vin: C11.1 J4.2 L2.1 SB1.1
pads on no net: B1.P1.3 B1.P1.8 B1.P2.1 B1.P3.1 B1.P3.2 B1.P3.3 B1.P3.4 B1.P3.5 B1.P3.6 B1.P3.7 B1.P3.8 B1.P5.1 B1.P5.2 B1.P5.3 B1.P5.4 B1.P5.5 B1.P5.6 B1.P6.1 B1.P6.2 B1.P6.3 B1.P6.4 B1.P6.5 B1.P6.6 B1.P6.7 B1.P6.8 B1.P20.1 B1.P20.2 B1.P20.3 B1.P20.4 B1.P20.5 B1.P20.6 B1.P20.7 B1.P20.8 B1.P20.10 B1.P20.11 B1.P20.12 B1.P20.13 B1.P24.1 B1.P24.2 B1.P24.3 B1.P24.4 B1.P24.5 B1.P24.6 B1.P24.7 B1.P24.8 B1.P24.9 B1.P24.10 B1.P24.11 B1.P24.12 B1.P24.13 B1.P24.14 B1.P24.15 B1.P24.16 B1.P24.17 B1.P24.18 C14.2 J1.1 J1.2 J1.5 J1.7 J2.1 J2.2 J2.5 J2.7 J4.0 J7.0 J7.1 J7.8 JP2.2 JP3.2 Mec?.0 T1.2 U1.6 U1.11 U2.1 U2.2 U2.3 U2.4 U2.5 U2.9 U2.10 U2.13 U3.5 U3.8 U4.6 U4.9 U6.4 U6.6 U7.6 U7.9

## Polygon pours and split planes (outlines as drawn)
no net on Internal Plane 1 (split plane): 136.248,0.252 90.709,0.252 0.252,0.252 0.252,63.248 136.248,63.248
no net on Internal Plane 2 (split plane): 136.248,0.252 90.709,0.252 0.252,0.252 0.252,63.248 136.248,63.248

## Silkscreen, mask and mechanical layers (free items; w line width, h text height)
Top Overlay:
  text ".Pcb_File_Name_No_Path" at 227,69 h3
  text ".PcbDate" at 227,64 h3
  text "Ver .PcbRevision" at 268,64 h3
  text ".PcbDesigner" at 229,63.4 h3
Mechanical 1:
  the board outline again, w0.254

## Text inside footprints (layer, text, board x,y; h text height)
B1: Bottom Overlay "P20" at 18.501,44.1 h1.5 r90; Bottom Overlay "P2" at 50.501,6 h1.5 r90; Bottom Overlay "P1" at 27.701,6 h1.5 r90; Bottom Overlay "P6" at 87.631,54.102 h1.5 r90; Bottom Overlay "P3" at 64.771,54.102 h1.5 r90; Bottom Overlay "P4" at 42.927,54.102 h1.5 r90; Bottom Overlay "P24" at 92.456,54.61 h1.5 r90; Bottom Overlay "P5" at 61.976,36.83 h1.5 r90